# Altium PCB latch_sdc_pcb.PcbDoc
Units mm, origin at the board's own origin, x right, y up, seen from the top; angles counter-clockwise.
Board outline 65 x 42.75 mm, 2 copper layers (Top Layer, Bottom Layer); 25 components, 18 nets, 96 pads, 12 vias.
Unrouted connection lines stored in the file: 36.
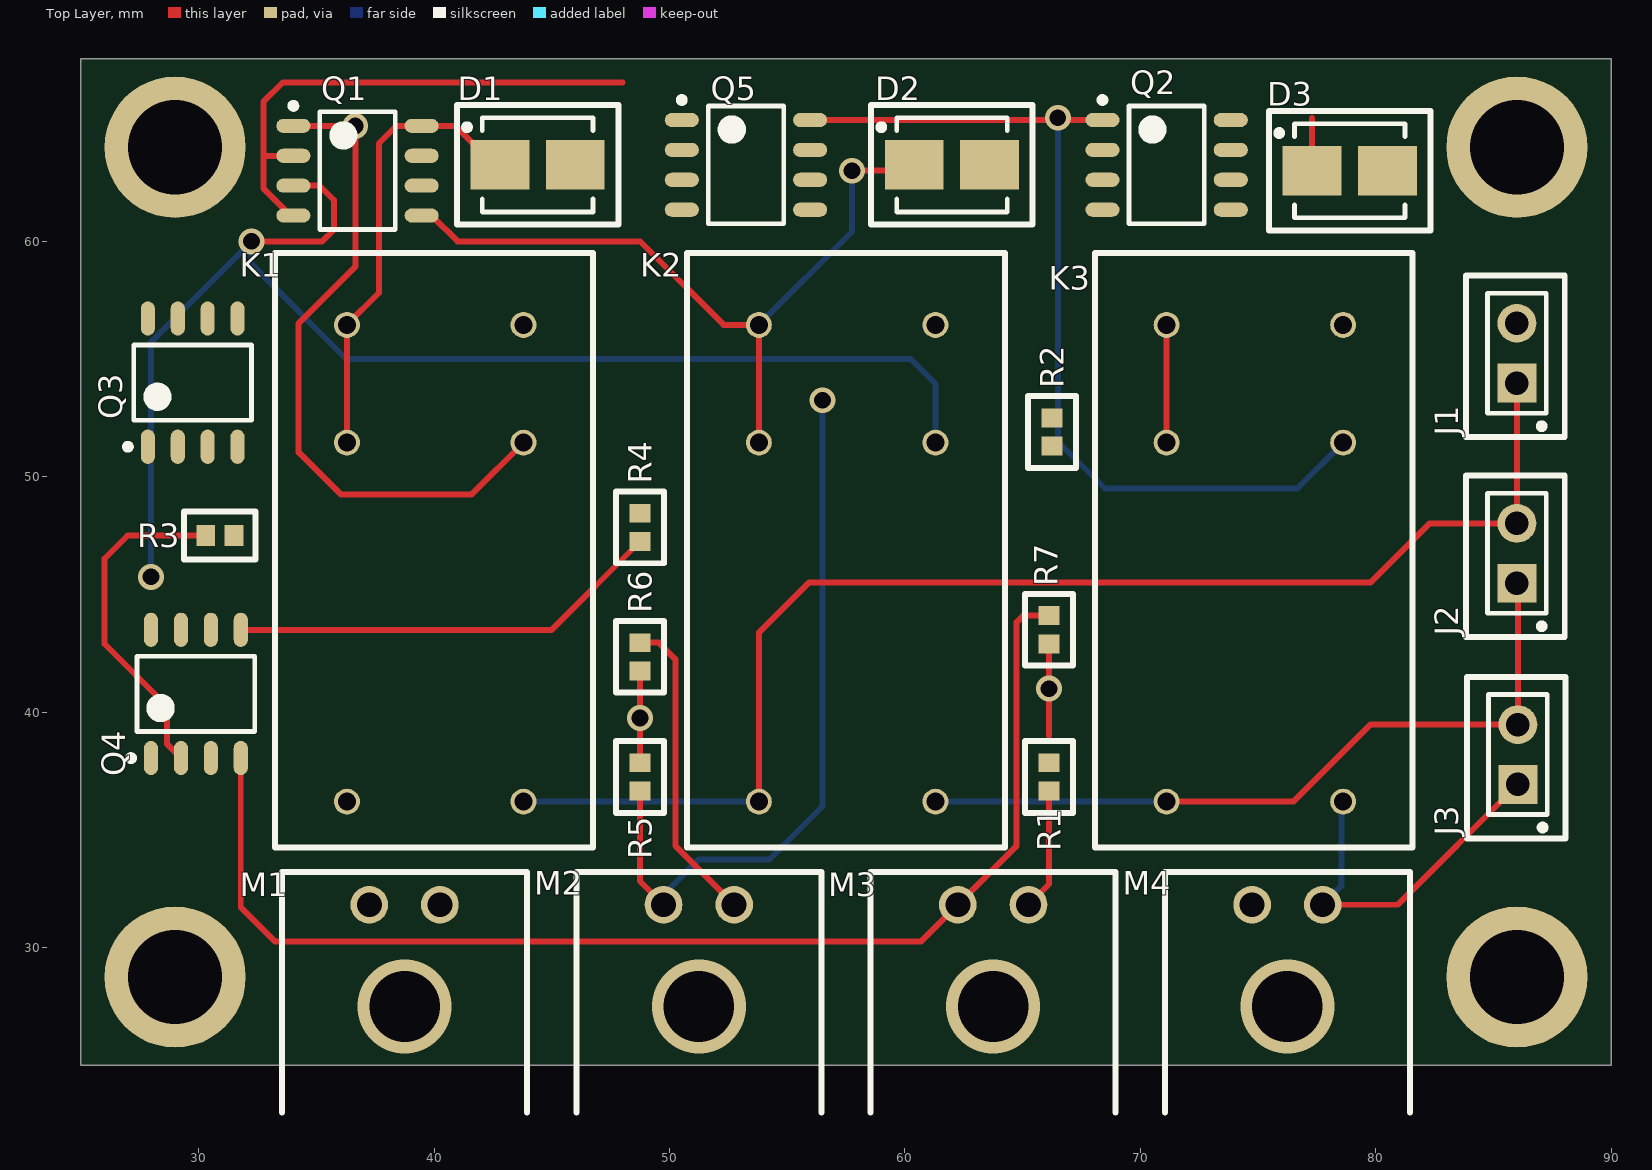
[diagram p0: Top Layer view]
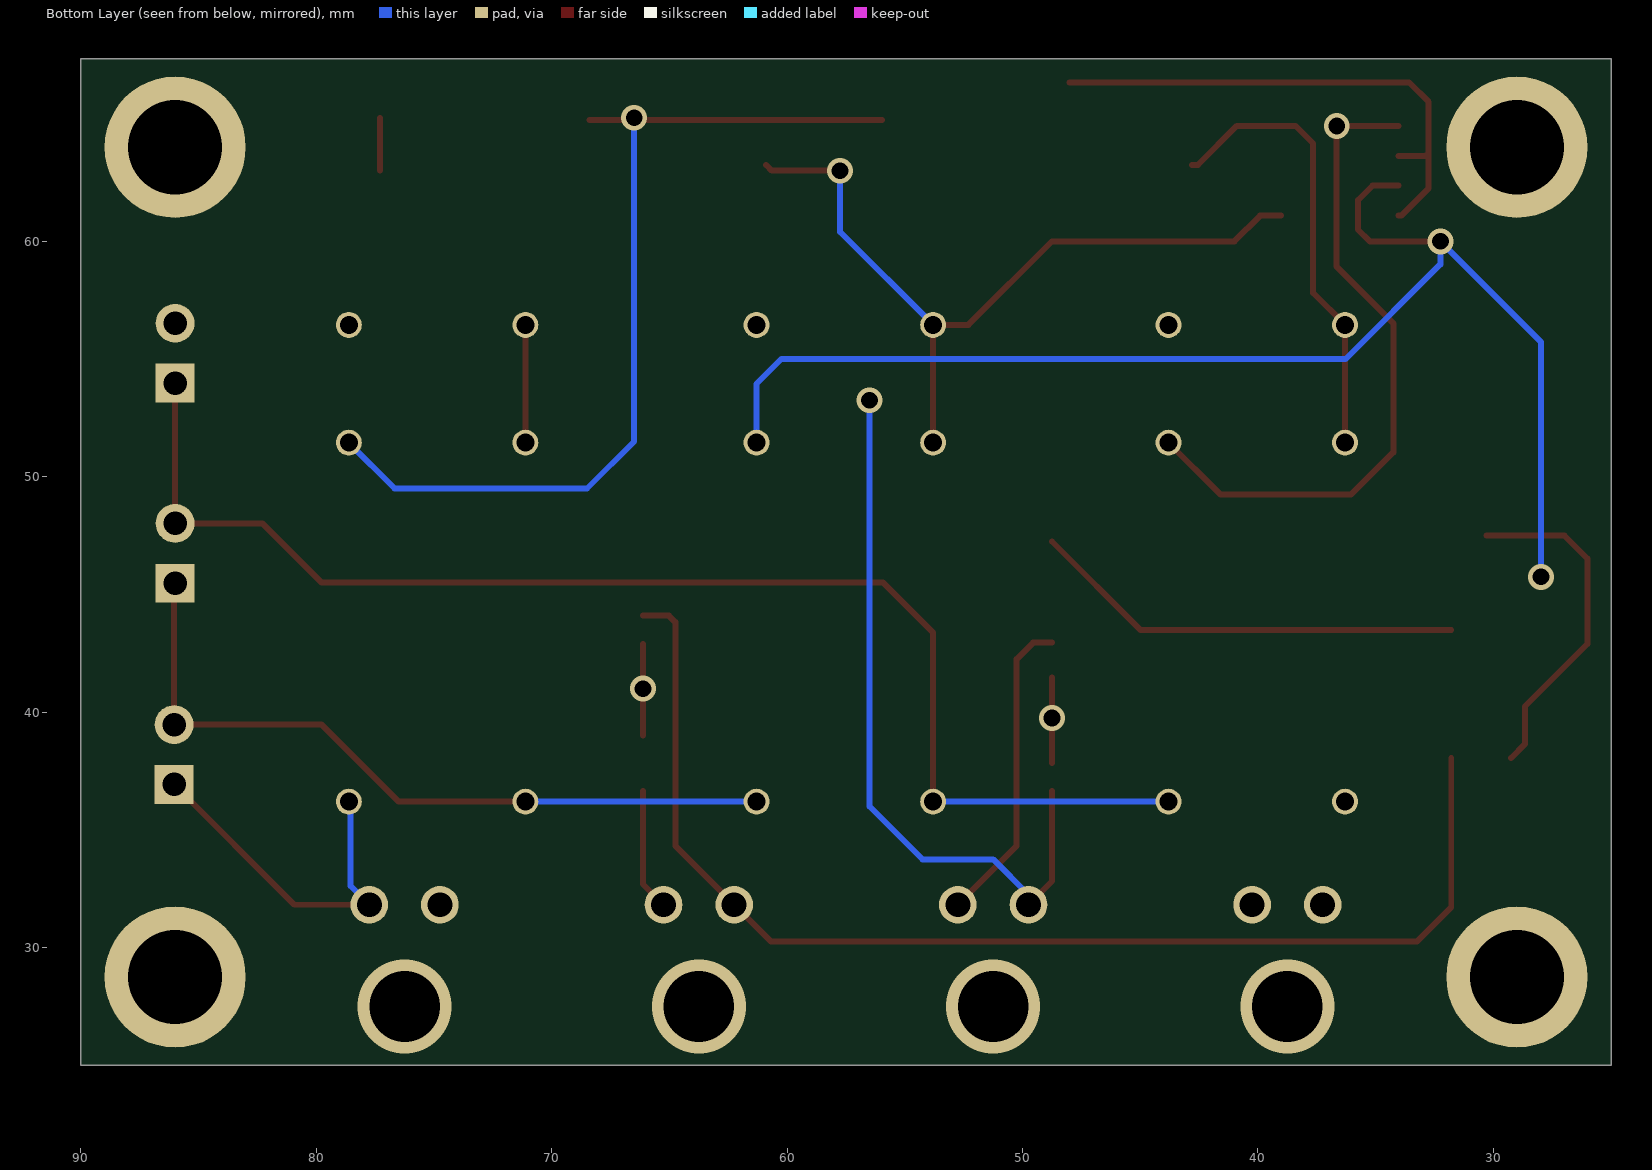
[diagram p1: Bottom Layer view, seen from below]

## Layer stack, top to bottom
Top Solder: solder mask 0.0102, Solder Resist, Dk 3.5
Top Layer: signal copper 0.0356
Dielectric 1: dielectric 0.32, FR-4, Dk 4.8
Bottom Layer: signal copper 0.0356
Bottom Solder: solder mask 0.0102, Solder Resist, Dk 3.5

## Board outline
25,25 90,25 90,67.75 25,67.75

## Design rules (kind name [scope] priority, off if disabled: settings)
Clearance [All] p1: gap=0.254 ignorepadtopadclearanceinfootprint=FALSE except(0: Arc-Hole Track-Hole SMDPad-Hole THPad-Hole Via-Hole Fill-Hole Poly-Hole Region-Hole Text-Hole)
PolygonConnect [All] p1: connectstyle=Relief reliefconductorwidth=0.254 reliefentries=4 polygonreliefangle="90 Angle" airgapwidth=0.254
RoutingVias [All] p1: holewidth=0.711 width=1.27 viastyle="Through Hole" minholewidth=0.711 minwidth=1.27 maxholewidth=0.711 maxwidth=1.27
SolderMaskExpansion [All] p1: expansion=0.102
Width [All] p1: maxlimit=0.254 minlimit=0.254 preferedwidth=0.254
30 further rules are at their usual default settings.

## Classes and differential pairs
component class latch_sdc_sch: D1 D2 D3 J1 J2 J3 K2 K3 M1 M2 M3 M4 Q2 Q3 R1 R2 R3 R4 R5 R6 R7

## Components (designator, comment, footprint, x,y, rotation, side; value= is the part's Value field where it differs from the comment)
D1 "SD560BTR" DIOM4436X26N 44.4,63.25 r0 top
D2 "SD560BTR" DIOM4436X26N 62,63.25 r0 top
D3 "SD560BTR" DIOM4436X26N 78.9,63 r0 top
J1 "TSW-102-07-L-S" TSW-102-XX-X-S 86,55.25 r90 top
J2 "TSW-102-07-L-S" TSW-102-XX-X-S 86,46.75 r90 top
J3 "TSW-102-07-L-S" TSW-102-XX-X-S 86.04,38.2 r90 top
K1 "3A" RELAY02_FOOTPRINT 46.5,34.5 r90 top
K2 "3A" RELAY02_FOOTPRINT 64,34.5 r90 top
K3 "3A" RELAY02_FOOTPRINT 81.32,34.5 r90 top
M1 "MOLEX" "MOLEX 1" 38.75,27.5 r0 top
M2 "MOLEX" "MOLEX 1" 51.25,27.5 r0 top
M3 "MOLEX" "MOLEX 1" 63.75,27.5 r0 top
M4 "MOLEX" "MOLEX 1" 76.25,27.5 r0 top
Q1 "DMN2029USD-13" SOIC127P600X175-8N 36.75,63 r0 top
Q2 "DMN2029USD-13" SOIC127P600X175-8N 71.12,63.25 r0 top
Q3 "DMN2029USD-13" SOIC127P600X175-8N 29.75,54 r90 top
Q4 "DMN2029USD-13" SOIC127P600X175-8N 29.885,40.775 r90 top
Q5 "DMN2029USD-13" SOIC127P600X175-8N 53.25,63.25 r0 top
R1 "10K" 10KOHM 66.125,37.25 r90 top
R2 "10K" 10KOHM 66.25,51.9 r90 top
R3 "10K" 10KOHM 30.9,47.5 r180 top
R4 "10K" 10KOHM 48.75,47.85 r270 top
R5 "10K" 10KOHM 48.75,37.25 r90 top
R6 "10K" 10KOHM 48.75,42.35 r270 top
R7 "10K" 10KOHM 66.125,43.5 r270 top

## Footprints (in the part's own frame and the unit in brackets; to place one, negate y for a bottom-side part, rotate by r counter-clockwise, add the part's x,y. Pads: shape width x height; smd on the part's side, far side on the other; paste and mask are expansions set on the pad)
10KOHM [mm] "Chip Resistor, 2-Leads, Body 1.50x0.80mm, IPC Medium Density"
  rect 0.8x0.9 smd: 1(-0.6,0) 2(0.6,0)
  silkscreen extent -1.52,-1.02 1.52,1.02, body extent -0.8,-0.45 0.8,0.45, height 0.5
DIOM4436X26N [mm] "Molded Diode, 2-Leads, Body 4.38x3.62mm, IPC Medium Density"
  rect 2.5x2.1 smd: 1(-1.6,0) 2(1.6,0)
  silkscreen extent -3.43,-2.54 3.43,2.54, body extent -2.35,-1.97 2.35,1.97, height 2.6
"MOLEX 1" [mm]
  round 1.6 hole 1.06: 1(-1.5,4.32) 2(1.5,4.32)
  silkscreen extent -5.21,-4.5 5.21,5.71, body extent -4.82,-4.57 4.83,5.33, height 6.13
RELAY02_FOOTPRINT [mm]
  round 1.1 hole 0.762: 1(1.7,10.2) 2(16.95,10.2) 3(21.95,10.2) 4(21.95,2.7) 5(16.95,2.7) 6(1.7,2.7)
  silkscreen extent -0.25,-0.25 25,13.25, body extent 0,0 24.4,12.9, height 0.25
SOIC127P600X175-8N [mm] "SOIC, 8-Leads, Body 4.90x3.90mm, Pitch 1.27mm, IPC Medium Density"
  oval 1.45x0.6 smd: 1(-2.725,1.905) 2(-2.725,0.635) 3(-2.725,-0.635) 4(-2.725,-1.905) 5(2.725,-1.905) 6(2.725,-0.635) 7(2.725,0.635) 8(2.725,1.905)
  silkscreen extent -2.85,-2.5 1.6,2.88, body extent -2,-2.5 2,2.5, height 1.75
TSW-102-XX-X-S [mm] "2.54mm pitch, 2 pin, terminal strip"
  rect 1.65x1.65 hole 1 mask+0: 1(-1.27,0)
  round 1.65 hole 1 mask+0: 2(1.27,0)
  silkscreen extent -3.56,-2.03 3.3,2.16

## Part data
D1 D2 D3: "DIODE GEN PURP 600V 5A SMB", Average Rectified Current=5A, Case/Package=SMB, Manufacturer=SMC, Max Reverse Voltage (DC)=600V, Supplier Part Number 1=1655-1530-1-ND, Manufacturer Part Number=SD560BTR, Mount="Surface Mount", Packaging="Tape and Reel", Pricing 1="1=0.5, 10=0.358, 100=0.2106, 500=0.11922, 1000=0.0914 (USD)", Stock 1=109105, Supplier 1=Digi-Key
J1 J2 J3: "CONN HEADER VERT 2POS 2.54MM", Color=Black, Current Rating=7.6A, Manufacturer=Samtec, Max Operating Temperature=125°C, Max Voltage Rating (AC)=550V, Min Operating Temperature=-55°C, Package Quantity=1, Supplier Part Number 1=SAM1031-02-ND, ComponentLink1Description=http://suddendocs.samtec.com/prints/tsw-xxx-xx-x-x-xx-xxx-footprint.pdf?src-supplier=Avnet, ComponentLink1URL=http://suddendocs.samtec.com/prints/tsw-xxx-xx-x-x-xx-xxx-footprint.pdf?src-supplier=Avnet, ComponentLink2Description=http://suddendocs.samtec.com/prints/tsw-xxx-xx-x-x-xx-xxx-footprint.pdf?src-supplier=Avnet+Europe, ComponentLink2URL=http://suddendocs.samtec.com/prints/tsw-xxx-xx-x-x-xx-xxx-footprint.pdf?src-supplier=Avnet+Europe, ComponentLink3Description=http://suddendocs.samtec.com/prints/tsw-xxx-xx-x-x-xx-xxx-footprint.pdf?src-supplier=Digi-Key, ComponentLink3URL=http://suddendocs.samtec.com/prints/tsw-xxx-xx-x-x-xx-xxx-footprint.pdf?src-supplier=Digi-Key, ComponentLink4Description=http://www.farnell.com/datasheets/1596380.pdf?src-supplier=Element14, ComponentLink4URL=http://www.farnell.com/datasheets/1596380.pdf?src-supplier=Element14, Connector Type="Male Pin", Contact Material=Bronze, Contact Mating Length=0.23inch, Contact Plating=Gold, Depth=2.54mm, Gender=Male, Housing Color=Black, Housing Material=Polyester, Lead Free="Lead Free", Length=5.08mm, Manufacturer Part Number=TSW-102-07-L-S, Max Current Rating=7.6A, Mount="Through Hole", Number of Contacts=2, Number of Positions=2, Number of Rows=1, Orientation=Straight, Packaging=Bulk, Pitch=2.54mm, Pricing 1="1=0.22, 10=0.211, 25=0.1796, 50=0.1572, 100=0.146, 250=0.12916, 500=0.12356 (USD)", Radiation Hardening=No, REACH SVHC="No SVHC", Stock 1=176, Supplier 1=Digi-Key, Termination=Solder, Voltage Rating=550V, Width=2.54mm
K1 K2 K3: library part OSA-SS-212DM3,000, "RELAY TE CONNECTIVITY / OEG         OSA-SS-212DM3,000             General Purpose Relay, OSA Series, Power, Non Latching, DPST-NO, 12 VDC, 3 A", Coil Current=45mA, Coil Power=600mW, Coil Resistance=270R, Coil Voltage (DC)=12V, Contact Voltage Rating (AC)=240V, Manufacturer="TE Connectivity", Max Operating Temperature=60°C, Min Operating Temperature=-30°C, Package Quantity=1000, Supplier Part Number 1=OSA-SS-212DM3,000-ND, Coil Type=Non-Latching, ComponentLink1Description=http://www.farnell.com/datasheets/1652820.pdf?src-supplier=Farnell, ComponentLink1URL=http://www.farnell.com/datasheets/1652820.pdf?src-supplier=Farnell, ComponentLink2Description=http://www.farnell.com/cad/1652820.pdf?src-supplier=Element14, ComponentLink2URL=http://www.farnell.com/cad/1652820.pdf?src-supplier=Element14, ComponentLink3Description=http://www.te.com/commerce/DocumentDelivery/DDEController?Action=srchrtrv&DocNm=5-1419124-6&DocType=Customer+Drawing&DocLang=English&src-supplier=Digi-Key, ComponentLink3URL=http://www.te.com/commerce/DocumentDelivery/DDEController?Action=srchrtrv&DocNm=5-1419124-6&DocType=Customer+Drawing&DocLang=English&src-supplier=Digi-Key, Contact Current Rating=3A, Contact Material=Silver, ELV=Compliant, Height=0.976inch, Length=24.4mm, Manufacturer Part Number=OSA-SS-212DM3,000, Mount="Through Hole", Operate Time=20ms, Packaging=Box, Pricing 1="1=2.54, 10=2.385, 25=2.1204, 50=2.0142, 100=1.9083, 250=1.69624, 500=1.59022, 1000=1.48421, 5000=1.4312 (USD)", REACH SVHC=Unknown, Relay Type="General Purpose", Release Time=10ms, Stock 1=2623, Supplier 1=Digi-Key, Termination=PCB, Throw Configuration=DPST, Weight=13g, Width=12.9mm
M1 M2 M3 M4: library part 43650-0200, "MOLEX - 43650-0200 - CONNECTOR, HEADER, 2POS, 1ROW, 3MM", Color=Black, Contact Resistance=10mR, Current Rating=5A, Flammability Rating="UL94 V-0", Insulation Resistance=1GR, Manufacturer=Molex, Max Operating Temperature=105°C, Min Operating Temperature=-40°C, Package Quantity=3927, Supplier Part Number 1=0436500200, Voltage Rating=600V, Voltage Rating (AC)=250V, ComponentLink1Description=http://www.molex.com/webdocs/datasheets/pdf/en-us/0436500200_PCB_HEADERS.pdf?src-supplier=Avnet, ComponentLink1URL=http://www.molex.com/webdocs/datasheets/pdf/en-us/0436500200_PCB_HEADERS.pdf?src-supplier=Avnet, ComponentLink2Description=http://www.onlinecomponents.com/productFiles/mf-MOL/1029720436500200_pcb_headers.pdf?src-supplier=Onlinecomponents.com, ComponentLink2URL=http://www.onlinecomponents.com/productFiles/mf-MOL/1029720436500200_pcb_headers.pdf?src-supplier=Onlinecomponents.com, ComponentLink3Description=http://www.farnell.com/datasheets/1933359.pdf?src-supplier=Element14, ComponentLink3URL=http://www.farnell.com/datasheets/1933359.pdf?src-supplier=Element14, ComponentLink4Description=https://www.distrelec.biz/Web/Downloads/20/66/04402066.pdf?mime=application%2Fpdf&src-supplier=Distrelec, ComponentLink4URL=https://www.distrelec.biz/Web/Downloads/20/66/04402066.pdf?mime=application%2Fpdf&src-supplier=Distrelec, ComponentLink5Description=http://www.jameco.com/Jameco/Products/ProdDS/884053.pdf?src-supplier=Jameco, ComponentLink5URL=http://www.jameco.com/Jameco/Products/ProdDS/884053.pdf?src-supplier=Jameco, ComponentLink6Description=http://www.mouser.com/ds/2/276/0436500200_PCB_HEADERS-148844.pdf?src-supplier=Mouser, ComponentLink6URL=http://www.mouser.com/ds/2/276/0436500200_PCB_HEADERS-148844.pdf?src-supplier=Mouser, ComponentLink7Description=http://uk.rs-online.com/webdocs/13c3/0900766b813c3b7d.pdf?src-supplier=RSComponents, ComponentLink7URL=http://uk.rs-online.com/webdocs/13c3/0900766b813c3b7d.pdf?src-supplier=RSComponents, ComponentLink8Description=http://www.molex.com/webdocs/datasheets/pdf/en-us/0436500200_PCB_HEADERS.pdf?src-supplier=Avnet+Europe, ComponentLink8URL=http://www.molex.com/webdocs/datasheets/pdf/en-us/0436500200_PCB_HEADERS.pdf?src-supplier=Avnet+Europe, ComponentLink9Description=http://www.farnell.com/datasheets/1709823.pdf?src-supplier=Element14, ComponentLink9URL=http://www.farnell.com/datasheets/1709823.pdf?src-supplier=Element14, Connector Type=Plug,Socket, Contact Material=Brass,Tin, Contact Plating=Tin, Depth=9.9mm, Gender=Male, Glow Wire Compliant=Compliant, Halogen Free="Low Halogen", Height=5.57mm, Housing Color=Black, Housing Material=Thermoplastic, Lead Free="Lead Free", Length=9.65mm, Manufacturer Part Number=43650-0200, Mount="Through Hole", Number of Circuits=2, Number of Contacts=2, Number of Positions=2, Number of Rows=1, Orientation="Right Angle", Packaging=Tray, Pitch=3mm, Pricing 1="1=0.39494, 10=0.36394, 25=0.34123, 50=0.33065, 100=0.32119 (USD)", Radiation Hardening=No, REACH SVHC=Unknown, Stock 1=0, Supplier 1=Avnet, Termination=Solder, Voltage Rating (DC)=250V, Working Voltage=250V
Q1 Q2 Q3 Q4 Q5: "MOSFET 2N-CH 20V 5.8A 8SO", Case/Package=SO, Continuous Drain Current (ID)=5.8A, Drain to Source Resistance=35mR, Drain to Source Voltage (Vdss)=20V, Gate to Source Voltage (Vgs)=8V, Input Capacitance=1.171nF, Manufacturer=Diodes, Max Operating Temperature=150°C, Max Power Dissipation=1.2W, Min Operating Temperature=-55°C, Package Quantity=2500, Supplier Part Number 1=DMN2029USD-13DICT-ND, ComponentLink1Description=https://www.diodes.com/assets/Datasheets/DMN2029USD.pdf?src-supplier=Digi-Key, ComponentLink1URL=https://www.diodes.com/assets/Datasheets/DMN2029USD.pdf?src-supplier=Digi-Key, Fall Time=53.5ns, FET Type="2 N-Channel", Height=1.5mm, Length=4.95mm, Manufacturer Part Number=DMN2029USD-13, Mount="Surface Mount", Number of Pins=8, Packaging="Tape and Reel", Pricing 1="1=0.47, 10=0.397, 100=0.2974, 500=0.21812, 1000=0.16854 (USD)", Radiation Hardening=No, Rds On Max=25mR, REACH SVHC="No SVHC", Rise Time=33.3ns, Stock 1=1364, Supplier 1=Digi-Key, Turn-Off Delay Time=119.3ns, Turn-On Delay Time=16.5ns, Width=3.95mm
R1 R2 R3 R4 R5 R6 R7: library part RNCP0603FTD10K0, "RES 10K OHM 1% 1/8W 0603", Case/Package=0603, Case Code (Metric)=1608, Manufacturer="Stackpole Electronics", Max Operating Temperature=155°C, Max Power Dissipation=125mW, Min Operating Temperature=-55°C, Resistance=10kR, Supplier Part Number 1=RNCP0603FTD10K0DKR-ND, Temperature Coefficient=100ppm/°C, Tolerance=1%, Case Code (Imperial)=0603, Composition="Thin Film", Contact Plating=Tin,Matte, Features="Moisture Resistant,Anti-Sulfur", Height=0.02inch, Lead Free="Lead Free", Length=0.059inch, Manufacturer Part Number=RNCP0603FTD10K0, Mount="Surface Mount", Number of Terminations=2, Packaging="Tape and Reel", Pricing 1="1=0.1, 10=0.067, 100=0.0273, 1000=0.01224, 2500=0.01063 (USD)", Radiation Hardening=No, Stock 1=85524, Supplier 1=Digi-Key, Width=0.031inch

## Free pads (board coordinates)
  round 6 hole 4 unplated: H(29,28.75) H(29,64) H(86,28.75) H(86,64)

## Via types
v1: diameter 1.1, hole 0.711, Top Layer to Bottom Layer, 8 vias
v2: diameter 4, hole 3, Top Layer to Bottom Layer, 4 vias

## Nets (pads, with @x,y where several pads share a name; then routed paths per layer and width w, separated by ;. In a path a pad name is that pad's centre, name@x,y a point inside that pad or via, vN(x,y) a via of type N, cw(c..) or ccw(c..) an arc to the next point about the centre after c; other vN are vias at no path point)
+12: D1.2 D2.2 D3.2 J1.2 K1.1 K1.4 K2.4 K3.4 M1.1 R2.1 R3.1 R4.1 | length 0.4
  Top Layer w0.254: K1.1@36.04,36.46 K1.1
+12V_TO_AIR: J3.1 K3.6 M4.2 | length 15.1
  Top Layer w0.254: M4.2 80.93,31.82 J3.1
  Bottom Layer w0.254: M4.2 78.55,32.62 K3.6@78.55,36.2
BMS_FAULT: M2.1 Q2.4 R5.1 | length 31.2
  Top Layer w0.254: R5.1 48.75,32.82 M2.1
  Bottom Layer w0.254: M2.1 49.75,32.25 51.25,33.75 54.25,33.75 56.5,36 v1(56.5,53.25)
BSPD_FAULT: M3.1 Q4.4 R7.1 | length 52.6
  Top Layer w0.254: Q4.4 31.79,31.71 33.25,30.25 60.68,30.25 M3.1 64.75,34.32 64.75,43.825 65.025,44.1 R7.1
GND: M1.2 pad.H Q2.3 Q3.1 Q3.3 Q4.1 Q4.3 Q5.1 R1.2 R5.2 R6.2 R7.2 | length 11.1
  Top Layer w0.254: pad.H@27.845,29.905 29,28.75 pad.H@30.385,30.135 ; R5.2 v1(48.75,39.75) R6.2@48.75,41.475 ; 66.125,39 v1(66.125,41) R7.2
IMD_FAULT: M2.2 Q3.4 R6.1 | length 13.3
  Top Layer w0.254: R6.1 49.55,42.95 50.25,42.25 50.25,34.32 M2.2
NetD1_1: D1.1 K1.2 K1.3 Q1.8 | length 19.4
  Top Layer w0.254: K1.2 K1.3 37.655,57.805 37.655,64.155 38.405,64.905 Q1.8 40.895,64.905 42.55,63.25 D1.1
NetD2_1: D2.1 K2.2 K2.3 Q1.5 | length 33.1
  Top Layer w0.254: Q1.5@39.025,61.095 Q1.5 39.905,61.095 41,60 48.75,60 52.3,56.45 K2.3 K2.2 ; v1(57.75,63) 60.65,63 D2.1@60.9,63.25
  Bottom Layer w0.254: K2.3 57.75,60.4 v1(57.75,63)
NetD3_1: D3.1 K3.2 K3.3 Q2.8 | length 7.3
  Top Layer w0.254: K3.2 71.12,56.38 71.05,56.45 K3.3 ; D3.1 77.3,65.25
NetJ1_1: J1.1 J2.2 K1.6 K2.1 | length 57.3
  Top Layer w0.254: K2.1 53.8,43.375 55.925,45.5 79.77,45.5 82.29,48.02 J2.2 J1.1
  Bottom Layer w0.254: K1.6 K2.1
NetJ2_1: J2.1 J3.2 K2.6 K3.1 | length 32.1
  Top Layer w0.254: K3.1@71.05,36.2 76.5,36.2 79.77,39.47 J3.2 86.04,45.44 J2.1
  Bottom Layer w0.254: K2.6 K3.1@71.05,36.2
NetK1_5: K1.5 Q1.1 Q3.8 | length 28.7
  Top Layer w0.254: Q1.1 v1(36.655,64.905) 36.655,58.925 34.25,56.52 34.25,51.04 36.04,49.25 41.6,49.25 K1.5
NetK2_5: K2.5 Q1.3 Q4.8 | length 57.6
  Top Layer w0.254: v1(32.25,60) 35.25,60 35.75,60.5 35.75,61.75 35.135,62.365 Q1.3
  Bottom Layer w0.254: v1(27.98,45.75) 27.98,55.73 v1(32.25,60) 32.25,59.025 36.275,55 60.25,55 61.3,53.95 K2.5
NetK3_5: K3.5 Q2.1 Q5.8 | length 39.9
  Top Layer w0.254: Q5.8 Q2.1
  Bottom Layer w0.254: v1(66.5,65.25) 66.5,51.5 68.5,49.5 76.67,49.5 K3.5
NetQ2_5: Q2.5 Q3.2 R2.2
NetQ3_5: Q3.5 Q4.2 R3.2 | length 14.5
  Top Layer w0.254: Q4.2 28.661,38.639 28.661,40.239 26,42.9 26,46.52 26.98,47.5 R3.2
NetQ4_5: Q4.5 Q5.2 R4.2 | length 18.5
  Top Layer w0.254: Q4.5 45,43.5 R4.2
SET/RESET: M3.2 Q1.2 Q1.4 Q2.2 R1.1 | length 27.5
  Top Layer w0.254: Q1.4 33.907,61.095 32.75,62.252 32.75,63.75 ; Q1.2 32.865,63.635 32.75,63.75 ; 48,66.75 33.575,66.75 32.75,65.925 32.75,63.75 ; M3.2 66.125,32.695 R1.1
pads on no net: M4.1 Q1.6 Q1.7 Q2.6 Q2.7 Q3.6 Q3.7 Q4.6 Q4.7 Q5.3 Q5.4 Q5.5 Q5.6 Q5.7
copper on no net:
  other v2: 38.75,27.5 51.25,27.5 63.75,27.5 76.25,27.5